# Altium PCB PCB.PcbDoc
Units mil, origin at the board's own origin, x right, y up, seen from the top; angles counter-clockwise.
Board outline 2055 x 3100 mil, 2 copper layers (Top Layer, Bottom Layer); 74 components, 111 nets, 390 pads, 96 vias.
Unrouted connection lines stored in the file: 52.
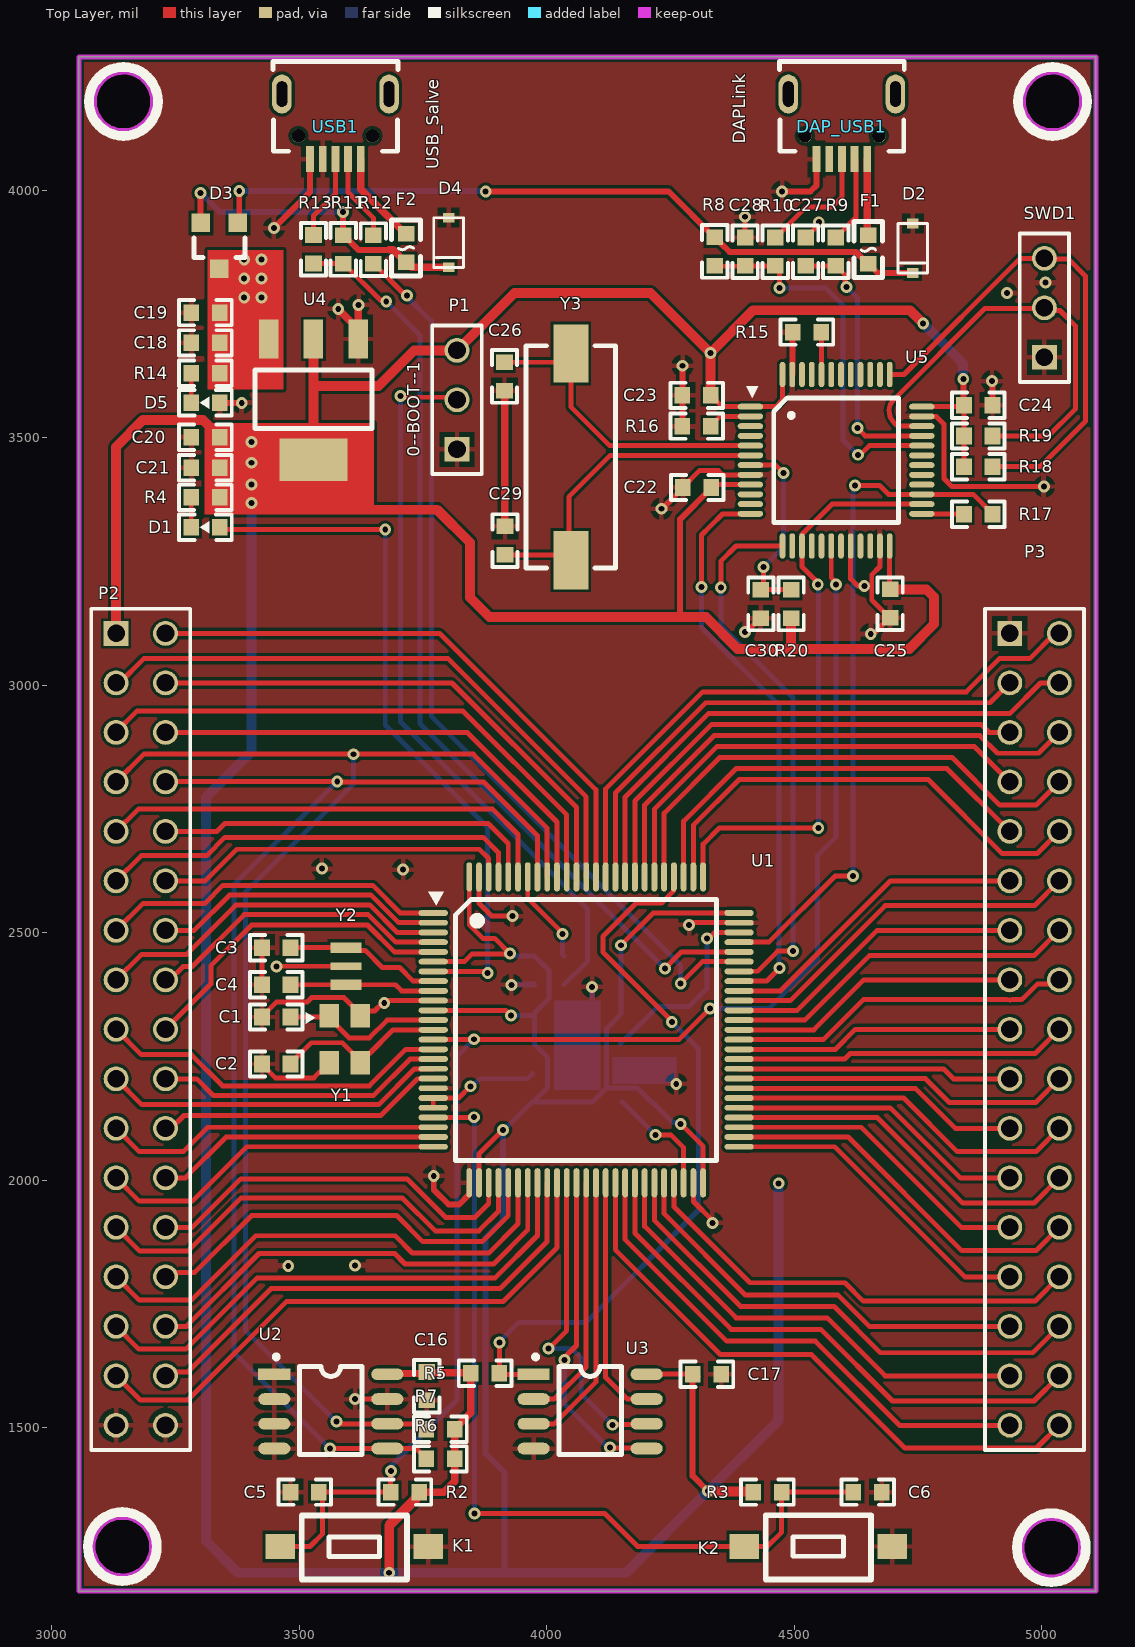
[diagram p0: Top Layer view]
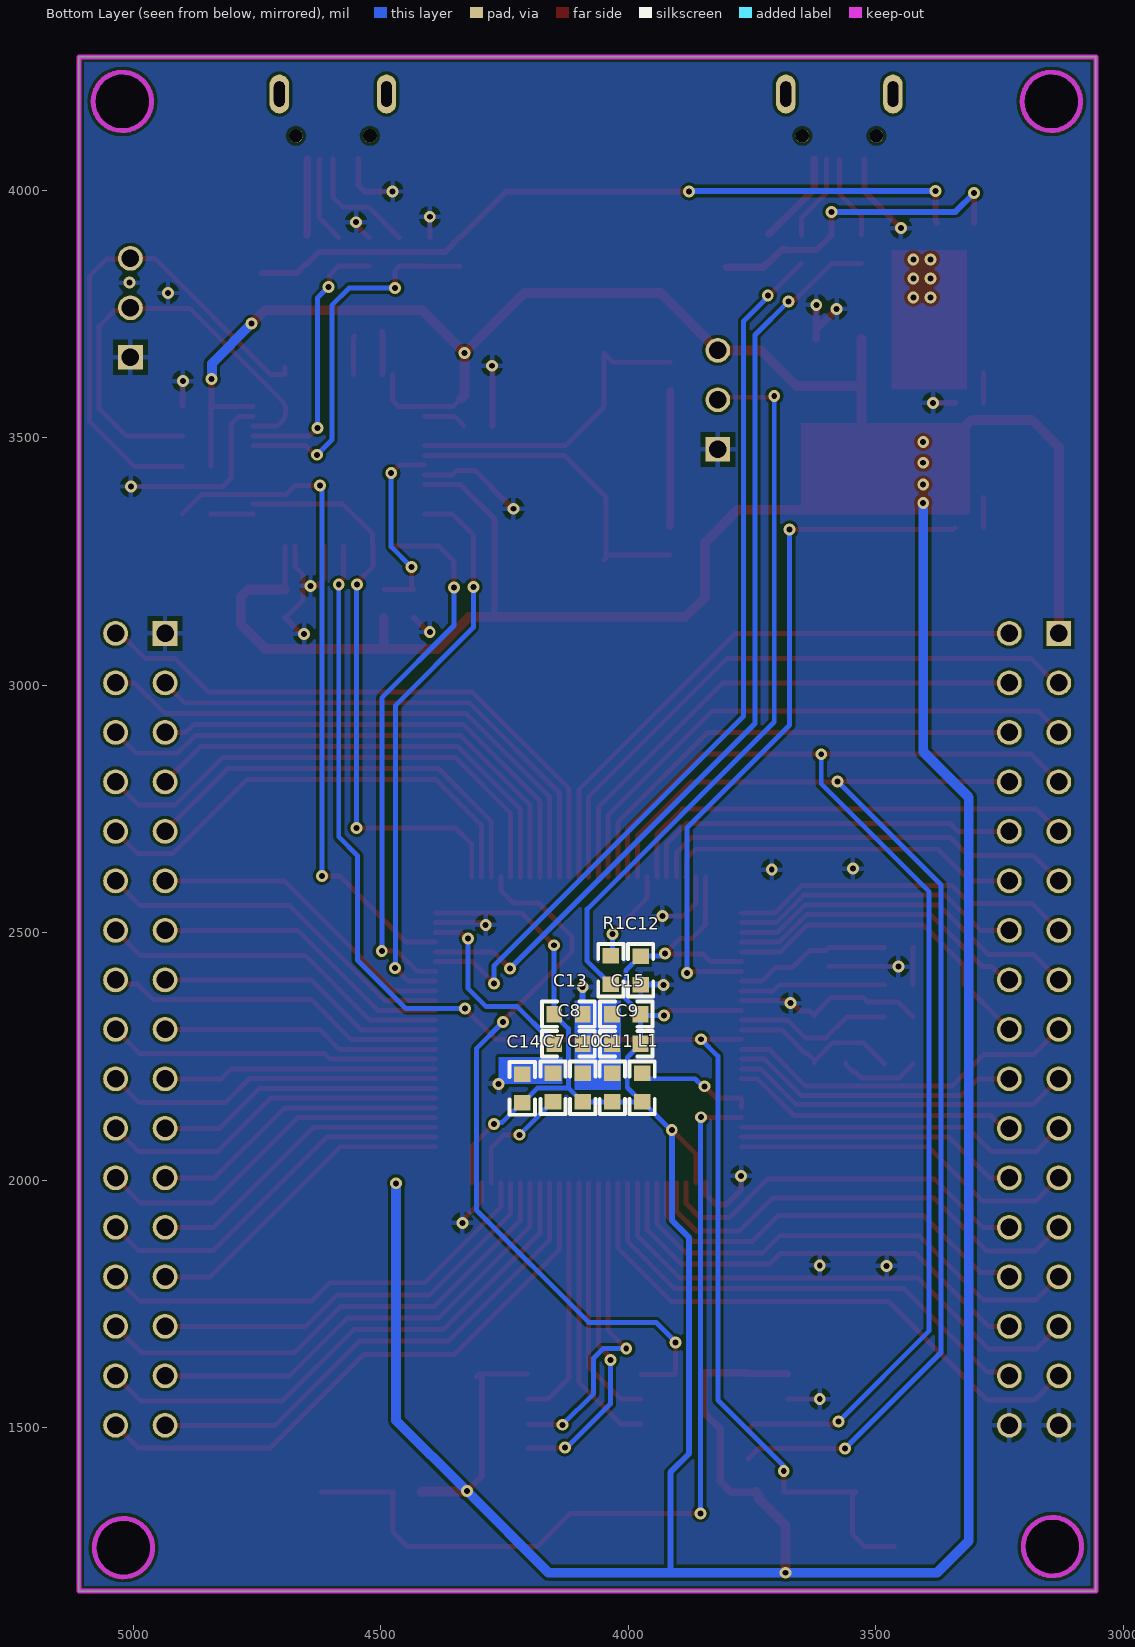
[diagram p1: Bottom Layer view, seen from below]
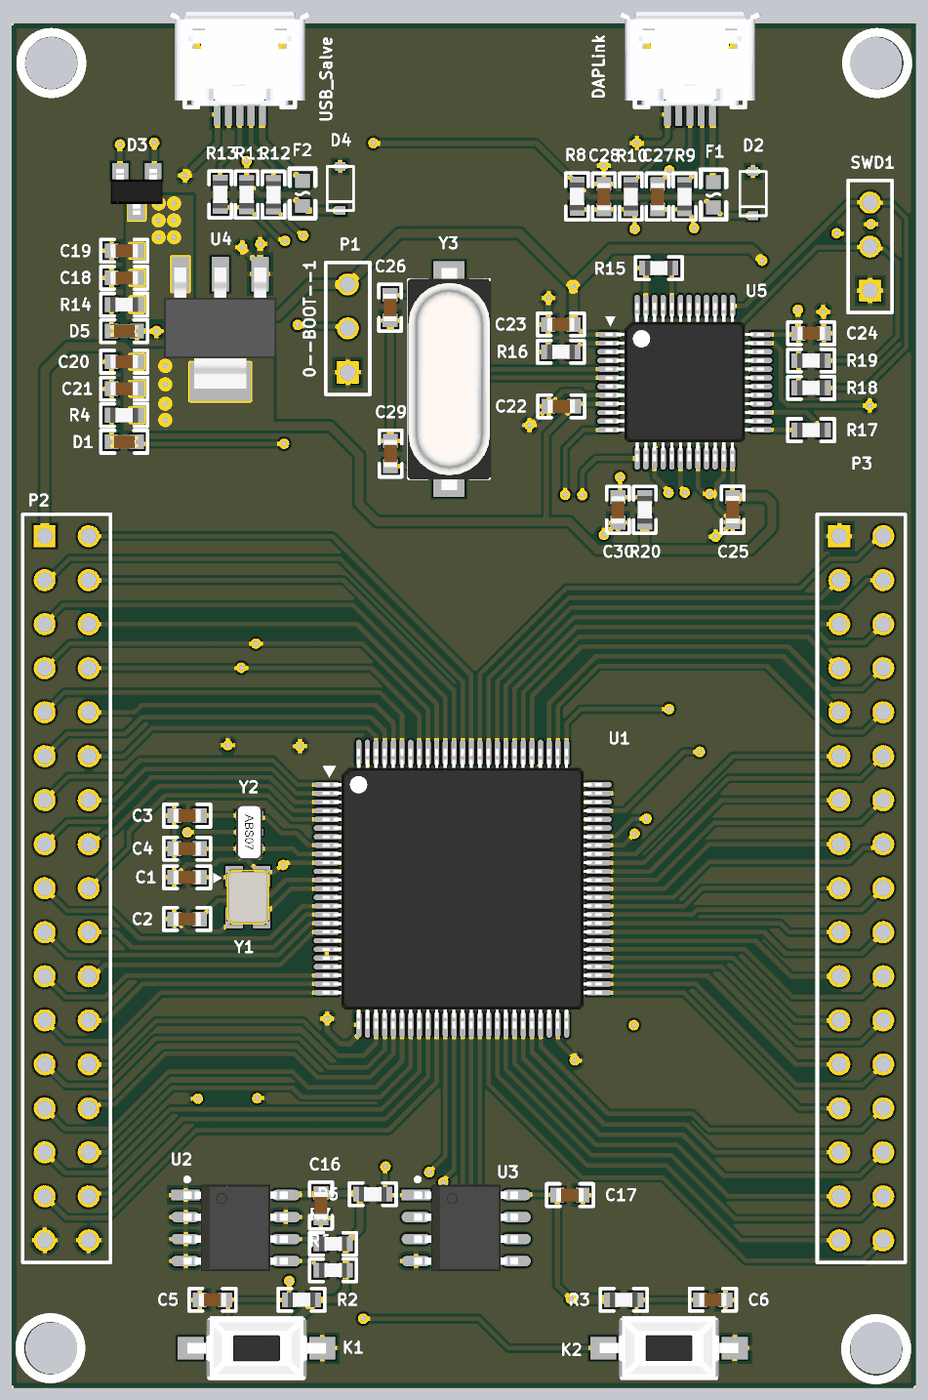
[diagram p2: 3D render of the assembled board from above, using the file's embedded part models]
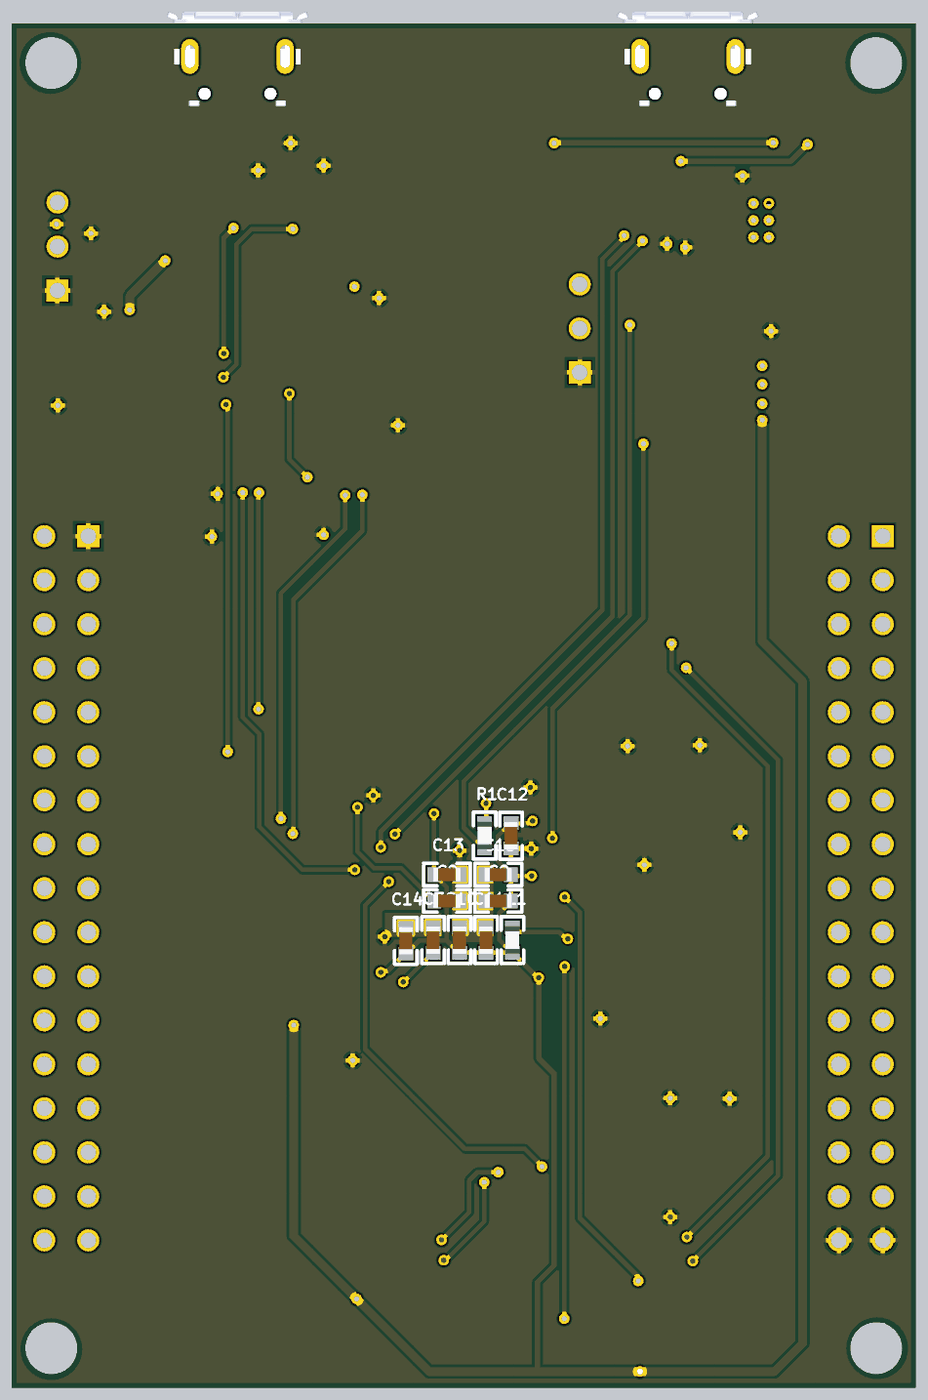
[diagram p3: 3D render of the assembled board from below, using the file's embedded part models]

## Layer stack, top to bottom
Top Solder: solder mask 0.4, Solder Resist, Dk 3.5
Top Layer: signal copper 1.4
Dielectric 1: dielectric 12.6, FR-4, Dk 4.8
Bottom Layer: signal copper 1.4
Bottom Solder: solder mask 0.4, Solder Resist, Dk 3.5

## Board outline
3055,1170 5110,1170 5110,4270 3055,4270
cut-out: 3204.06,1260 cw(c3145,1260) 3145,1200.94 cw(c3145,1260) 3085.94,1260 cw(c3145,1260) 3145,1319.06 cw(c3145,1260)
cut-out: 5020,1319.06 cw(c5020,1260) 5079.06,1260 cw(c5020,1260) 5020,1200.94 cw(c5020,1260) 4960.94,1260 cw(c5020,1260)
cut-out: 4960.94,4180 cw(c5020,4180) 5020,4239.06 cw(c5020,4180) 5079.06,4180 cw(c5020,4180) 5020,4120.94 cw(c5020,4180)
cut-out: 3145,4120.94 cw(c3145,4180) 3085.94,4180 cw(c3145,4180) 3145,4239.06 cw(c3145,4180) 3204.06,4180 cw(c3145,4180)

## Design rules (kind name [scope] priority, off if disabled: settings)
Clearance [All] p1: gap=6 ignorepadtopadclearanceinfootprint=TRUE
PolygonConnect [All] p1: connectstyle=Relief reliefconductorwidth=10 reliefentries=4 polygonreliefangle="90 Angle" airgapwidth=10
RoutingVias [All] p1: holewidth=12 width=24 viastyle="Through Hole" minholewidth=12 minwidth=24 maxholewidth=12 maxwidth=24
SolderMaskExpansion [All] p1: expansion=4 istentingtop=FALSE
UnRoutedNet [All] p1: checkbadconnections=TRUE
Width PWR_W [InNetClass('PWR')] p1: maxlimit=30 minlimit=12 preferedwidth=15
Width SIG_W [InNetClass('SIG_OUT')] p2: maxlimit=10 minlimit=6 preferedwidth=10
29 further rules are at their usual default settings.

## Classes and differential pairs
net class PWR: 3V3 5V GND NetD2_2 NetD3_2 NetDAP_USB1_1 NetF2_1
net class QSPI: PB2 PC11 PE7 PE8 PE9 PE10
net class SIG_OUT: PA1 PA2 PA3 PA4 PA5 PA6 PA7 PA8 PA15 PB0 PB1 PB3 PB4 PB5 PB6 PB7 PB8 PB9 PB10 PB11 PB12 PB13 PB14 PB15 PC0 PC1 PC2 PC3 PC4 PC5 PC6 PC7 PC8 PC9 PC10 PC12 PD0 PD1 PD2 PD3 PD4 PD5 PD6 PD7 PD8 PD9 PD10 PD11 PD12 PD13 PD14 PD15 PE0 PE1 PE2 PE3 PE4 PE5 PE6 PE11 PE12 PE13 PE14 PE15
component class SCH3: C22 C23 C24 C25 C26 C27 C28 C29 C30 R15 R16 R17 R18 R19 R20 SWD1 U5 Y3
component class SCH2: C18 C19 C20 C21 D D2 D3 D4 D5 D? DAP_USB1 F F1 F2 F? R8 R9 R10 R11 R12 R13 R14 U4 USB1
component class SCH1: C1 C2 C3 C4 C5 C6 C7 C8 C9 C10 C11 C12 C13 C14 C15 C16 C17 D1 K1 K2 L1 P1 P2 P3 R1 R2 R3 R4 R5 R6 R7 U1 U2 U3 Y1 Y2

## Components (designator, comment, footprint, x,y, rotation, side; value= is the part's Value field where it differs from the comment)
C1 "200" C_SOP_0603 3453.74,2330 r180 top
C2 "200" C_SOP_0603 3453.74,2235 r0 top
C3 "200" C_SOP_0603 3453.74,2470 r0 top
C4 "200" C_SOP_0603 3453.74,2395 r0 top
C5 "104" C_SOP_0603 3511.26,1370 r180 top
C6 "104" C_SOP_0603 4648.74,1370 r0 top
C7 "223" C_SOP_0603 4152,2187.26 r270 bottom
C8 "223" C_SOP_0603 4120.74,2276 r0 bottom
C9 "104" C_SOP_0603 4004,2276 r0 bottom
C10 "104" C_SOP_0603 4092,2187.26 r90 bottom
C11 "104" C_SOP_0603 4032,2187.26 r90 bottom
C12 "104" C_SOP_0603 3975,2424.26 r270 bottom
C13 "104" C_SOP_0603 4120.74,2336 r180 bottom
C14 "104" C_SOP_0603 4214,2185.74 r90 bottom
C15 "104" C_SOP_0603 4004,2336 r0 bottom
C16 "104" C_SOP_0603 3758,1584 r270 top
C17 "104" C_SOP_0603 4324,1608 r0 top
C18 "104" C_SOP_0603 3310.74,3692 r0 top
C19 "106" C_SOP_0603 3310.74,3753.47 r0 top
C20 "106" C_SOP_0603 3310.74,3501.47 r0 top
C21 "104" C_SOP_0603 3310.74,3440 r0 top
C22 "104" C_SOP_0603 4304.26,3400 r0 top
C23 "104" C_SOP_0603 4303.26,3586 r0 top
C24 "104" C_SOP_0603 4872.26,3566 r180 top
C25 "104" C_SOP_0603 4694,3165.26 r90 top
C26 "200" C_SOP_0603 3915,3624.26 r90 top
C27 "180" C_SOP_0603 4523.26,3876.39 r270 top
C28 "180" C_SOP_0603 4401,3876.39 r270 top
C29 "200" C_SOP_0603 3916,3292.74 r270 top
C30 "104" C_SOP_0603 4433,3164.74 r90 top
D1 "LED_RED" LED_0603_R 3310.74,3319.53 r0 top
D2 "Diode" SOD-123 4740,3883.34 r270 top
D3 "BAT54C" SOT23_3 3339,3888.26 r90 top
D4 "Diode" SOD-123 3802,3895 r270 top
D5 "LED_RED" LED_0603_R 3310.74,3571 r0 top
DAP_USB1 "USB_Micor" USB_Micor 4592.73,4142.34 r90 top locked
F1 "6V/500mA" FUSE_0603 4650,3908.3 r270 top
F2 "6V/500mA" FUSE_0603 3716,3911.38 r270 top
K1 "KEY" SW_PB_3X6 3611.51,1260 r180 top locked
K2 "KEY" SW_PB_3X6 4549.01,1260.13 r180 top locked
L1 "600R/100MHz" R_SMD_0603 3972,2187.26 r90 bottom
P1 "Header 3" HDR1X3 3819,3477 r90 top
P2 "Header 17X2" HDR2X17 3130,3105 r270 top
P3 "Header 17X2" HDR2X17 4936,3105 r270 top
R1 "10K" R_SMD_0603 4035,2424.74 r270 bottom
R2 "10k" R_SMD_0603 3713.74,1370 r0 top
R3 "10k" R_SMD_0603 4446.26,1370 r180 top
R4 "4.7K" R_SMD_0603 3310.74,3380 r0 top
R5 "10k" R_SMD_0603 3875.74,1610 r180 top
R6 "4.7K" R_SMD_0603 3785.56,1437 r180 top
R7 "4.7K" R_SMD_0603 3785.56,1497 r180 top
R8 "10k" R_SMD_0603 4340,3877 r90 top
R9 "33R" R_SMD_0603 4584.4,3876.39 r270 top
R10 "33R" R_SMD_0603 4462.13,3876.39 r270 top
R11 "10k" R_SMD_0603 3589,3881 r90 top
R12 "33R" R_SMD_0603 3650,3880.74 r270 top
R13 "33R" R_SMD_0603 3529,3881.39 r270 top
R14 "4.7K" R_SMD_0603 3310.74,3631 r0 top
R15 "10k" R_SMD_0603 4526,3714 r180 top
R16 "10K" R_SMD_0603 4303.26,3524 r0 top
R17 "100R" R_SMD_0603 4872.26,3346 r0 top
R18 "10K" R_SMD_0603 4872.26,3442 r180 top
R19 "10K" R_SMD_0603 4872.26,3504 r180 top
R20 "10K" R_SMD_0603 4494,3164.74 r270 top
SWD1 "Header 3" HDR1X3 5006,3663 r90 top
U1 "STM32H750VB" LQFP_100_14X14 4080,2304.06 r270 top locked
U2 "AT24C02" SOIC_8 3564,1533 r270 top
U3 "W25Q256JVEQ" SOIC_8 4088,1533 r270 top
U4 "LDO-3.3-AMS1117" SOT223_3 3529,3578 r90 top
U5 "STM32F103C8" LQFP_48_7X7 4585,3455 r270 top locked
USB1 "USB_Micor" USB_Micor 3569.38,4142.34 r90 top locked
Y1 "XTAL_4" XTAL_SMD_3225 3592,2285 r270 top
Y2 "XTAL-3" XTAL_SMD_3215_2 3595,2432.6 r270 top
Y3 "8MHz" XTAL_SMD_49S 4049,3462 r90 top

## Footprints (in the part's own frame and the unit in brackets; to place one, negate y for a bottom-side part, rotate by r counter-clockwise, add the part's x,y. Pads: shape width x height; smd on the part's side, far side on the other; paste and mask are expansions set on the pad)
C_SOP_0603 [mm]
  rect 0.8x0.85 smd: 1(-0.73,0) 2(0.73,0)
  silkscreen extent -1.35,-0.65 1.35,0.65, body extent -0.8,-0.4 0.8,0.4, height 0.6
FUSE_0603 [mm]
  rect 0.8x0.85 smd: 1(-0.028,0) 2(1.432,0)
  silkscreen extent -0.74,-0.74 2.13,0.74
HDR1X3 [mm] "Connector; Header; 3 Position"
  rect 1.27x1.27 hole 0.9: 1(0,0)
  round 1.27 hole 0.9: 2(2.54,0) 3(5.08,0)
  silkscreen extent -1.27,-1.27 6.35,1.27
HDR2X17 [mm] "Connector; Header; 17x2 Position"
  rect 1.27x1.27 hole 0.9: 1(0,0)
  round 1.27 hole 0.9: 2(0,2.54) 3(2.54,0) 4(2.54,2.54) 5(5.08,0) 6(5.08,2.54) 7(7.62,0) 8(7.62,2.54) 9(10.16,0) 10(10.16,2.54) 11(12.7,0) 12(12.7,2.54) 13(15.24,0) 14(15.24,2.54) 15(17.78,0) 16(17.78,2.54) 17(20.32,0) 18(20.32,2.54) 19(22.86,0) 20(22.86,2.54) 21(25.4,0) 22(25.4,2.54) 23(27.94,0) 24(27.94,2.54) 25(30.48,0) 26(30.48,2.54) 27(33.02,0) 28(33.02,2.54) 29(35.56,0) 30(35.56,2.54) 31(38.1,0) 32(38.1,2.54) 33(40.64,0) 34(40.64,2.54)
  silkscreen extent -1.27,-1.27 41.91,3.81
LED_0603_R [mm]
  rect 0.8x0.85 smd: 1(-0.73,0) 2(0.73,0)
  silkscreen extent -1.35,-0.65 1.35,0.65, body extent -0.81,-0.4 0.81,0.4, height 0.6
LQFP_48_7X7 [mm]
  oval 0.3x1.3 smd: 1(-2.75,-4.4) 2(-2.25,-4.4) 3(-1.75,-4.4) 4(-1.25,-4.4) 5(-0.75,-4.4) 6(-0.25,-4.4) 7(0.25,-4.4) 8(0.75,-4.4) 9(1.25,-4.4) 10(1.75,-4.4) 11(2.25,-4.4) 12(2.75,-4.4) 25(2.75,4.4) 26(2.25,4.4) 27(1.75,4.4) 28(1.25,4.4) 29(0.75,4.4) 30(0.25,4.4) 31(-0.25,4.4) 32(-0.75,4.4) 33(-1.25,4.4) 34(-1.75,4.4) 35(-2.25,4.4) 36(-2.75,4.4)
  oval 1.3x0.3 smd: 13(4.4,-2.75) 14(4.4,-2.25) 15(4.4,-1.75) 16(4.4,-1.25) 17(4.4,-0.75) 18(4.4,-0.25) 19(4.4,0.25) 20(4.4,0.75) 21(4.4,1.25) 22(4.4,1.75) 23(4.4,2.25) 24(4.4,2.75) 37(-4.4,2.75) 38(-4.4,2.25) 39(-4.4,1.75) 40(-4.4,1.25) 41(-4.4,0.75) 42(-4.4,0.25) 43(-4.4,-0.25) 44(-4.4,-0.75) 45(-4.4,-1.25) 46(-4.4,-1.75) 47(-4.4,-2.25) 48(-4.4,-2.75)
  silkscreen extent -3.8,-4.6 3.2,3.2, body extent -4.57,-4.57 4.57,4.57, height 1.62
LQFP_100_14X14 [mm]
  oval 0.3x1.5 smd: 1(-6,-7.85) 2(-5.5,-7.85) 3(-5,-7.85) 4(-4.5,-7.85) 5(-4,-7.85) 6(-3.5,-7.85) 7(-3,-7.85) 8(-2.5,-7.85) 9(-2,-7.85) 10(-1.5,-7.85) 11(-1,-7.85) 12(-0.5,-7.85) 13(0,-7.85) 14(0.5,-7.85) 15(1,-7.85) 16(1.5,-7.85) 17(2,-7.85) 18(2.5,-7.85) 19(3,-7.85) 20(3.5,-7.85) 21(4,-7.85) 22(4.5,-7.85) 23(5,-7.85) 24(5.5,-7.85) 25(6,-7.85) 51(6,7.85) 52(5.5,7.85) 53(5,7.85) 54(4.5,7.85) 55(4,7.85) 56(3.5,7.85) 57(3,7.85) 58(2.5,7.85) 59(2,7.85) 60(1.5,7.85) 61(1,7.85) 62(0.5,7.85) 63(0,7.85) 64(-0.5,7.85) 65(-1,7.85) 66(-1.5,7.85) 67(-2,7.85) 68(-2.5,7.85) 69(-3,7.85) 70(-3.5,7.85) 71(-4,7.85) 72(-4.5,7.85) 73(-5,7.85) 74(-5.5,7.85) 75(-6,7.85)
  oval 1.5x0.3 smd: 26(7.85,-6) 27(7.85,-5.5) 28(7.85,-5) 29(7.85,-4.5) 30(7.85,-4) 31(7.85,-3.5) 32(7.85,-3) 33(7.85,-2.5) 34(7.85,-2) 35(7.85,-1.5) 36(7.85,-1) 37(7.85,-0.5) 38(7.85,0) 39(7.85,0.5) 40(7.85,1) 41(7.85,1.5) 42(7.85,2) 43(7.85,2.5) 44(7.85,3) 45(7.85,3.5) 46(7.85,4) 47(7.85,4.5) 48(7.85,5) 49(7.85,5.5) 50(7.85,6) 76(-7.85,6) 77(-7.85,5.5) 78(-7.85,5) 79(-7.85,4.5) 80(-7.85,4) 81(-7.85,3.5) 82(-7.85,3) 83(-7.85,2.5) 84(-7.85,2) 85(-7.85,1.5) 86(-7.85,1) 87(-7.85,0.5) 88(-7.85,0) 89(-7.85,-0.5) 90(-7.85,-1) 91(-7.85,-1.5) 92(-7.85,-2) 93(-7.85,-2.5) 94(-7.85,-3) 95(-7.85,-3.5) 96(-7.85,-4) 97(-7.85,-4.5) 98(-7.85,-5) 99(-7.85,-5.5) 100(-7.85,-6)
  silkscreen extent -7.1,-8.1 6.7,6.7, body extent -8.07,-8.08 8.07,8.06, height 1.62
R_SMD_0603 [mm]
  rect 0.8x0.85 smd: 1(-0.73,0) 2(0.73,0)
  silkscreen extent -1.35,-0.65 1.35,0.65, body extent -0.8,-0.43 0.8,0.43, height 0.48
SOD-123 [mm]
  rect 0.5x0.6 smd: 1(-1.275,0) 2(1.275,0)
  silkscreen extent -1.27,-0.76 1.28,0.76
SOIC_8 [mm]
  rect 0.6x1.65 smd: 1(-1.905,-2.9)
  oval 0.6x1.65 smd: 2(-0.635,-2.9) 3(0.635,-2.9) 4(1.905,-2.9) 5(1.905,2.9) 6(0.635,2.9) 7(-0.635,2.9) 8(-1.905,2.9)
  silkscreen extent -2.9,-2.9 2.2,1.6, body extent -2.5,-3.01 2.5,3.01, height 1.75
SOT23_3 [mm]
  rect 0.95x0.95 smd: 1(1.175,-0.95) 2(1.175,0.95) 3(-1.175,0)
  silkscreen extent -0.6,-1.3 0.4,1.3, body extent -1.34,-1.5 1.3,1.5, height 1.08
SOT223_3 [mm]
  rect 2x1 smd: 1(3.1,-2.3) 2(3.1,0) 3(3.1,2.3)
  rect 2.2x3.5 smd: 4(-3.1,0)
  silkscreen extent -1.5,-3 1.5,3, body extent -3.5,-3.25 3.5,3.25, height 1.64
SW_PB_3X6 [mm]
  rect 1.5x1.3 smd: 1(-3.8,0) 2(3.8,0)
  silkscreen extent -2.7,-1.6 2.7,1.7, body extent -4,-1.85 4,1.85, height 2.6
USB_Micor [mm]
  rect 1.35x0.4 smd: 1(-2,-1.402) 2(-2,-0.752) 3(-2,-0.102) 4(-2,0.548) 5(-2,1.198)
  round 0.7 hole 0.7 unplated: G1(-0.813,-2.002) G2(-0.813,1.798)
  oval 2x1 hole 0.55 slot 1.3 at 0 deg: G3(1.337,-2.852) G6(1.337,2.648)
  silkscreen extent -1.6,-3.3 3,3.1, body extent -1.52,-4.2 3.91,4, height 2.68
XTAL_SMD_49S [mm]
  rect 3x1.8 smd: 1(-5.3,0) 2(5.3,0)
  silkscreen extent -5.7,-2.3 5.7,2.3, body extent -6.4,-2.43 6.4,2.4, height 4.4
XTAL_SMD_3215_2 [mm] "CSTCE16M0V53-R0"
  rect 0.55x1.6 smd: 1(-0.95,0) 3(0.95,0)
  rect 0.4x1.6 smd: 2(0,0)
  body extent -1.61,-0.76 1.61,0.76, height 0.91
XTAL_SMD_3225 [mm]
  rect 1.2x1 smd: 1(-1.2,-0.8) 2(1.2,-0.8) 3(1.2,0.8) 4(-1.2,0.8)
  silkscreen extent -1.4,-2 -0.8,-1.5, body extent -1.6,-1.25 1.6,1.25, height 0.6

## Part data
C1 C2 C3 C4 C5 C6 C7 C8 C9 C10 C11 C12 C13 C14 C15 C16 C17: library part Cap
C18 C19 C20 C21 C22 C23 C24 C25 C26 C27 C28 C29 C30: library part Cap, "电容_无极性"
D1 D5: library part LED, "发光二极管"
D2 D4: "肖特基二极管 / 1N4007、SS24"
D3: "肖特基二极管*2"
F1 F2: library part FUSE, "自恢复保险丝"
L1: library part L
P1 SWD1: "Header, 3-Pin", LatestRevisionDate=17-Jul-2002, LatestRevisionNote="Re-released for DXP Platform.", Publisher="Altium Limited"
P2 P3: "Header, 17-Pin, Dual row", LatestRevisionDate=17-Jul-2002, LatestRevisionNote="Re-released for DXP Platform.", Publisher="Altium Limited"
R1 R2 R3 R4 R5 R6 R7 R14: library part Res
R8 R9 R10 R11 R12 R13 R15 R16 R17 R18 R19 R20: library part Res, "电阻"
U1 U5: "ST-MCU"
U2: "EEPROM"
U3: "QSPI-FLASH"
U4: "LDO"
Y3: library part XTAL_SMD

## Via types
v1: diameter 24, hole 12, Top Layer to Bottom Layer, 96 vias

## Nets (pads, with @x,y where several pads share a name; then routed paths per layer and width w, separated by ;. In a path a pad name is that pad's centre, name@x,y a point inside that pad or via, vN(x,y) a via of type N, cw(c..) or ccw(c..) an arc to the next point about the centre after c; other vN are vias at no path point)
3V3: C9.1 C10.1 C11.1 C12.1 C13.1 C14.1 C15.1 C16.1 C17.1 C20.2 C21.2 C22.2 C23.2 C24.2 C25.2 L1.1 P1.3 P2.1 R2.2 R3.2 R4.2 R5.2 R6.1 R7.1 R18.2 R19.2 R20.2 U1.6 U1.11 U1.27 U1.50 U1.75 U1.100 U2.8 U3.8 U4.2 U4.4 U5.1 U5.9 U5.24 U5.36 U5.48 | length 13312.6
  Top Layer w10: U1.11 3917.57,2343.43 v1(3928,2333) ; U1.6 3833.85,2441.85 3849,2457 3925,2457 v1(3926,2458) 3895,2489 3871,2489 3843.78,2516.22 U1.100 ; U1.27 3863.46,2053.46 v1(3912,2102) ; v1(4150,2475) 4215.28,2540.28 U1.75 ; U3.8@4203.17,1609 4301.52,1609 C17.1@4306.52,1604 ; v1(4271,2114) 4316.22,2068.78 U1.50 ; C22.2 4338.79,3405.79 U5.9 ; C23.2@4337.37,3579.64 4342.75,3574.27 4343.73,3574.27 4354.73,3563.27 U5.1 4463.27,3563.27 4476.73,3576.73 U5.48 ; U5.24 4693.27,3194.73 C25.2 ; U5.36 4840.79,3563.27 C24.2 R19.2 R18.2
  Top Layer w12: 3529,3398 U4.4 ; 4270,3138 4270,3336.02 4333,3399.02 C22.2 ; C17.1 4295.26,1402.74 v1(4326,1372) ; v1(4842,3619) 4842,3567.52 C24.2
  Top Layer w15: U2.8 3679.82,1609.65 3757.65,1609.65 3759.37,1611.37 3845.63,1611.37 R5.2 3847,1530.68 3814.3,1497.98 R7.1 R6.1 3814.3,1392.3 3792,1370 R2.2
  Top Layer w20: P2.1 3130,3482 3184,3536 3305.94,3536 3339.48,3502.46 C20.2 ; U4.4 3529,3605 ; U4.2 3529,3605 ; 3623,3408 3623,3373 3641,3355 3779,3355 3845,3289 3845,3178 3885,3138 4270,3138 4322,3138 4386,3074 4497,3074 ; v1(3682,1207) 3682,1303 3736.73,1357.73 3736.73,1364.25 R2.2 ; v1(4326,1372) 4326.77,1371.23 4416.28,1371.23 R3.2 ; C23.2@4337.37,3579.64 4331.05,3585.97 v1(4331.05,3671.95) ; v1@4468.5,1994.5 v1(4469,1994) ; R20.2 4494,3077 4497,3074 ; C25.2 4768,3194 4783,3179 4783,3124 4733,3074 4497,3074 ; v1(4761,3731) 4734,3758 4417.09,3758 v1(4331.05,3671.95) ; 3529,3605 3660,3605 3732,3677 P1.3 3935,3793 4210,3793 v1(4331.05,3671.95)
  Bottom Layer w10: v1(3912,2102) 3914.5,2102 3971.02,2158.52 L1.1 L1.1@3972.98,2158.52 ; v1(3926,2458) 3929.79,2458 3934.79,2453 C12.1 3975.98,2453 4005,2423.98 4005,2366.72 3975.26,2336.98 C15.1 ; v1(3928,2333) 3972.26,2333 C15.1 ; v1(4150,2475) 4150,2335.54 4121,2306.54 4121,2187.46 4121.46,2187 ; v1(4271,2114) 4268.32,2116.68 4255.31,2116.68 4214.98,2157 C14.1 4213.02,2157 4183.02,2187 4121.46,2187 ; L1.1@3972.98,2158.52 C11.1 C10.1 4092.98,2158.52 4121.46,2187 ; L1.1@3972.98,2158.52 4002,2187.54 4002,2248.28 3975.26,2275.02 C9.1 C15.1
  Bottom Layer w12: v1(3912,2102) 3912,1919 3877,1884 3877,1448 3915,1410 3915,1213.5 3921.5,1207
  Bottom Layer w20: v1(3404,3369) 3404,2866 3312,2774 3312,1271 3376,1207 v1(3682,1207) 3921.5,1207 4161,1207 v1(4326,1372) 4469,1515 v1(4469,1994) ; v1(4761,3731) 4841.23,3650.77 4841.23,3619.77 v1(4842,3619)
  other v1: 3404,3406 3404,3450 3404,3492
5V: C18.2 C19.2 D3.3 R14.2 U4.3
  other v1: 3389,3784 3424,3784 3389,3822.5 3424,3822.5 3389,3861 3424,3861
A_SWCLK: U1.76 U5.15 U5.26 | length 1187.1
  Top Layer w10: U1.76 4316.22,2679.22 4349,2712 v1(4549,2712) ; v1(4548,3204) 4548,3208 4516.1,3239.9 U5.15 4516.45,3282.12 4516.45,3306.03 4576.84,3366.42 U5.26
  Bottom Layer w10: v1(4548,3204) 4549,3203 v1(4549,2712)
A_SWDIO: R17.2 U1.72 U5.27 | length 1378.6
  Top Layer w10: U1.72 4449.22,2481.22 4583,2615 v1(4619,2615) ; v1(4623,3404) 4673,3404 4690.9,3386.1 U5.27 4861.88,3386.1 4901,3346.98 R17.2
  Bottom Layer w10: v1(4619,2615) 4619,3400 v1(4623,3404)
BOOT0: P1.2 R1.2 | length 1483.3
  Top Layer w10: v1(3705,3585) 3707.68,3582.32 3813.68,3582.32 P1.2
  Bottom Layer w10: v1(3705,3585) 3705,2926 4083,2548 4083,2443.02 4035.98,2396 R1.2
DAP_RX: U1.68 U5.12 | length 1149.8
  Top Layer w10: v1(4313,3199) 4313,3304 4332,3323 4355.39,3346.39 4411.43,3346.39 U5.12 ; U1.68 4444.48,2402.48 v1(4471,2429)
  Bottom Layer w10: v1(4313,3199) 4313,3117 4470,2960 4470,2430 v1(4471,2429)
DAP_TX: U1.69 U5.13 | length 1111.8
  Top Layer w10: v1(4352,3198) 4352,3251 4382.77,3281.77 U5.13 ; U1.69 4389.4,2422.51 4426.51,2422.51 4467,2463 v1(4498,2463)
  Bottom Layer w10: v1(4352,3198) 4352,3121 4498,2975 v1(4498,2463)
DAP_USB_DM: C27.2 R9.2 U5.33 | length 544.2
  Top Layer w10: C27.2 R9.2 4585.38,3847.65 4596.13,3836.9 4596.13,3835.91 4603.32,3828.72 4603.32,3807.68 v1(4606,3805) ; v1(4628,3520) 4643.79,3504.21 U5.33
  Bottom Layer w10: v1(4606,3805) 4628,3783 v1(4628,3520)
DAP_USB_DP: C28.2 R8.1 R10.2 U5.32 | length 764.5
  Top Layer w10: R8.1@4340,3847 4409.35,3847 4410,3847.65 R10.2 4471,3838.78 v1(4471,3803) ; v1(4629,3466) 4633.47,3466 4652,3484.53 U5.32
  Bottom Layer w10: v1(4471,3803) 4564,3803 4599,3768 4599,3496 v1(4629,3466)
DNRST: C30.2 R20.1 U5.7 | length 389.5
  Top Layer w10: U5.7 4462.84,3445.16 v1(4479,3429) ; v1(4438,3239) 4438,3198.48 C30.2 R20.1
  Bottom Layer w10: v1(4438,3239) 4479,3280 v1(4479,3429)
GND: C1.2 C2.1 C3.1 C4.1 C5.2 C6.2 C7.1 C8.1 C9.2 C10.2 C11.2 C12.2 C13.2 C14.2 C15.2 C16.2 C17.2 C18.1 C19.1 C20.1 C21.1 C22.1 C23.1 C24.1 C25.1 C26.1 C27.1 C28.1 C29.1 C30.1 D2.1 D4.1 D5.2 DAP_USB1.5 K1.1 K2.1 P1.1 P2.33 P2.34 P3.1 R15.2 R16.1 SWD1.1 U1.10 U1.19 U1.26 U1.49 U1.74 U1.99 U2.1 U2.2 U2.3 U2.4 U2.7 U3.4 U4.1 U5.8 U5.20 U5.23 U5.35 U5.47 USB1.4 USB1.5 Y1.2 Y1.4 Y2.2 | length 3528.7
  Top Layer w10: C2.1 3425,2234.02 3452.02,2207 3529.75,2207 3541.88,2219.13 3545.82,2219.13 3560.5,2233.82 Y1.2 ; C1.2 3425,2330.98 3454.02,2360 3516,2360 3525,2369 3590.68,2369 3623.5,2336.18 Y1.4 3633.36,2342.11 3652.32,2342.11 3668.21,2358 v1(3672,2358) 3677.11,2363.11 U1.10 ; C4.1 C3.1 ; v1@3451.32,2429.32 v1(3454,2432) 3454.6,2432.6 Y2.2 ; v1(3613,1558) U2.7 ; U1.99 3863.46,2559.54 3889,2534 v1(3931,2534) ; C22.1 4275.52,3400.98 4308.54,3434 4347.04,3434 4355.56,3425.47 U5.8 ; v1(4288,2516) 4292.59,2520.59 U1.74 ; U1.49 4296.88,1994.65 4296.88,1957.12 4335,1919 v1(4335,1914) ; C28.1 v1(4401,3947) ; C27.1 4524.25,3905.13 4550,3930.88 v1(4550,3936) ; U5.20 4614.53,3215.47 4629,3201 v1(4642,3201) ; U5.23 4673.58,3240.42 4657,3223.83 4657,3172.54 C25.1@4693.02,3136.52 ; U5.35 4758.57,3543.24 4787.76,3543.24 4803,3528 4803,3418 4818.9,3402.1 5004.9,3402.1 v1(5005,3402)
  Top Layer w12: D5.2 v1(3384,3571) ; v1(3449,3924) 3522.19,3997.19 USB1.5 ; v1(3772,2009) 3772,1981 3802,1951 3823.21,1951 3843.78,1971.57 U1.26 ; v1(4232,3357) 4233.5,3357 4275.52,3399.02 C22.1 ; R16.1 C23.1 4274.52,3645.52 v1(4275,3646) ; v1(4401,3108) 4404.02,3108 4432.02,3136 C30.1 ; v1(4476,3998) 4533,3998 4545.55,4010.55 DAP_USB1.5 ; U5.47 4496.51,3628.32 4496.51,3713.25 R15.2 ; v1(4655,3104) 4660.5,3104 4693.02,3136.52 C25.1 ; v1(4900,3615) 4901,3614 C24.1
  Top Layer w15: v1(3579,3761) 3579,3760.28 3619.55,3719.73 U4.1 3619.78,3700.27 3619.78,3768.78 v1(3620,3769) ; C26.1 3915.5,3595.02 3915.5,3321.98 C29.1
  Bottom Layer w12: v1(3929,2395) 3929.52,2395.52 C12.2 ; C13.2 v1(4092,2391) ; C14.2 4242.52,2214.48 v1(4262,2195)
  other v1: 3478,1827 3613,1828 3710,2628 3546,2630 4930,3793 5008,3814
NetC26_2: C26.2 U5.5 Y3.2 | length 644.3
  Top Layer w10: C26.2 4031.34,3653 Y3.2 4049,3563 4127.47,3484.53 U5.5
NetC29_2: C29.2 U5.6 Y3.1 | length 662.6
  Top Layer w10: C29.2 4038.34,3264 Y3.1@4045,3257.34 ; Y3.1 Y3.1@4045,3257.34 ; U5.6 4128.84,3464.84 4045,3381 Y3.1@4045,3257.34
NetD1_1: D1.1 R4.1 | length 60.5
  Top Layer w10: D1.1 R4.1
NetD2_2: D2.2 D3.1 F1.2 R8.2 | length 1496
  Top Layer w12: D3.1 3379,3937.12 v1(3379,3999) ; v1(3877,3998) 4246.76,3998 4339.02,3905.74 R8.2 4340.98,3905.74 4351.73,3894.99 4351.73,3893.73 4369.46,3876 4624.94,3876 4649.02,3851.92 F1.2 4650.98,3851.92 4669.76,3833.14 D2.2
  Bottom Layer w12: v1(3379,3999) 3876,3999 v1(3877,3998)
NetD3_2: D3.2 D4.2 F2.2 R11.2 | length 651.6
  Top Layer w12: v1(3301,3995) 3301,3935.12 D3.2 ; v1(3589,3957) R11.2 3589.98,3909.74 3619.72,3880 3682,3880
  Top Layer w15: 3682,3880 3690.02,3880 3715.02,3855 F2.2 3716.98,3855 3727.18,3844.8 D4.2
  Bottom Layer w12: v1(3301,3995) 3339,3957 v1(3589,3957)
NetD5_1: D5.1 R14.1 | length 60
  Top Layer w10: D5.1 R14.1
NetDAP_USB1_1: DAP_USB1.1 F1.1 | length 155.1
  Top Layer w15: DAP_USB1.1 4648.29,4063.23 4648.29,3911.11 F1.1
NetDAP_USB1_2: DAP_USB1.2 R9.1 | length 177
  Top Layer w10: R9.1 4585.38,3905.13 4596.13,3915.87 4596.13,3916.86 4625,3945.73 4625,4060.93 DAP_USB1.2
NetDAP_USB1_3: DAP_USB1.3 R10.1 | length 245.3
  Top Layer w10: R10.1 4463.12,3905.13 4524.99,3967 4577,3967 4596.73,3986.73 DAP_USB1.3
NetF2_1: F2.1 USB1.1 | length 189.6
  Top Layer w15: USB1.1 3624.56,4002.94 3654,3973.5 3715.02,3912.48 F2.1
NetL1_2: L1.2 U1.20 U1.21 | length 240.9
  Top Layer w10: U1.21 3770.94,2165.42 3771.78,2166.26 3822.26,2166.26 v1(3846,2190)
  Bottom Layer w10: v1(3846,2190) 3849.79,2190 3865.04,2205.25 3961.25,2205.25 L1.2
NetR1_1: R1.1 U1.94 | length 189.9
  Top Layer w10: U1.94 3961.89,2570.11 4032,2500 v1(4032,2498)
  Bottom Layer w10: v1(4032,2498) 4032,2456.48 R1.1
NetR12_1: R12.1 USB1.2 | length 175.3
  Top Layer w10: USB1.2 3599,3996 3650,3945 R12.1
NetR13_1: R13.1 USB1.3 | length 171.9
  Top Layer w10: R13.1 3529,3949 3573.38,3993.38 USB1.3
NetR15_1: R15.1 U5.44 | length 78.8
  Top Layer w10: R15.1@4553,3706 4555.47,3703.53 U5.44
NetR16_2: R16.2 U5.2 | length 87.5
  Top Layer w10: R16.2@4332,3524.98 4342.75,3535.73 4350.25,3543.24 4411.43,3543.24 U5.2
NetR17_1: R17.1 U5.25 | length 85.6
  Top Layer w10: U5.25 4842.79,3346.73 R17.1
NRST: C5.1 K1.2 R2.1 U1.14 U5.18 | length 3012.1
  Top Layer w10: K1.2 3522,1260 3547,1285 3547,1363 C5.1 R2.1 3685,1412 v1(3685.75,1412.75) ; U1.14 3852.37,2284.37 v1(3853,2285) 4268,2285 v1(4330,2347) ; U5.18 4575.16,3217.63 4585,3207.79 v1(4585,3204)
  Bottom Layer w10: v1(3685.75,1412.75) 3685.75,1422.75 3819,1556 3819,2251 v1(3853,2285) ; v1(4330,2347) 4449,2347 4547,2445 4547,2656 4585,2694 v1(4585,3204)
OSC32_IN: C3.2 U1.8 Y2.1 | length 316.4
  Top Layer w10: C3.2 Y2.1 3600.27,2464.73 3633.27,2464.73 3668,2430 3703,2430 3730.52,2402.48 U1.8
OSC32_OUT: C4.2 U1.9 Y2.3 | length 293.7
  Top Layer w10: C4.2 3482.68,2395.2 Y2.3 3694.8,2395.2 3707.2,2382.8 U1.9
OSC_IN: C1.1 U1.12 Y1.1 | length 320.7
  Top Layer w10: C1.1 3558.81,2330 3600.81,2288 3642,2288 3677.74,2323.74 U1.12
OSC_OUT: C2.2 U1.13 Y1.3 | length 351.7
  Top Layer w10: C2.2 3482.48,2235.98 3524.5,2278 3587.19,2278 Y1.3@3623.5,2241.69 ; Y1.3 Y1.3@3623.5,2241.69 ; U1.13 3689.8,2304.06 3642.12,2256.38 3638.18,2256.38 Y1.3@3623.5,2241.69
PA0: C6.1 K2.2 R3.1 U1.22 | length 1769
  Top Layer w10: U1.22 v1@3852.37,2126.89 ; v1(3854,1327) 4117,1327 4183.87,1260.13 K2.2 4446.13,1260.13 4475,1289 R3.1 C6.1
  Bottom Layer w10: v1(3853,2127.52) 3854,2126.52 v1(3854,1327)
PA1: P2.21 U1.23 | length 680.8
  Top Layer w10: P2.21 3177,2058 3266,2058 3315.2,2107.2 U1.23
PA2: P2.24 U1.24 | length 575.1
  Top Layer w10: P2.24 3270,2005 3352.52,2087.52 U1.24
PA3: P2.23 U1.25 | length 705.9
  Top Layer w10: P2.23 3177,1958 3284,1958 3393.83,2067.83 U1.25
PA4: P2.26 U1.28 | length 779.6
  Top Layer w10: P2.26 3284,1905 3382,2003 3718,2003 3796,1925 3855,1925 3883.15,1953.15 U1.28
PA5: P2.25 U1.29 | length 938
  Top Layer w10: P2.25 3178,1857 3275,1857 3382,1964 3709,1964 3775,1898 3863,1898 3902.83,1937.83 U1.29
PA6: P2.28 U1.30 | length 854.1
  Top Layer w10: P2.28 3237.65,1812.65 3254.53,1812.65 3255.86,1813.99 3288.99,1813.99 3404,1929 3697,1929 3750,1876 3870,1876 3922.52,1928.52 U1.30
PA7: P2.27 U1.31 | length 1007.3
  Top Layer w10: P2.27 3177,1758 3282,1758 3412,1888 3694,1888 3729,1853 3883,1853 3942.2,1912.2 U1.31
PA8: P3.11 U1.67 | length 639
  Top Layer w10: U1.67 4472.8,2382.8 4695,2605 P3.11
PA11: R12.2 U1.70 | length 1849.8
  Top Layer w10: R12.2 3650.98,3852 3714.98,3788 v1(3718,3788) ; v1(4271,2398) 4314.85,2441.85 U1.70
  Bottom Layer w10: v1(3718,3788) 3718,3785 3767,3736 3767,2938 4271,2434 v1(4271,2398)
PA12: R11.1 R13.2 U1.71 | length 1924.9
  Top Layer w10: R13.2@3529.98,3852.65 R13.2 3529.39,3852.26 R11.1 3589.98,3852.26 3663.57,3778.68 3673.32,3778.68 v1(3676,3776) ; v1(4239,2428) 4272.54,2461.54 U1.71
  Bottom Layer w10: v1(3676,3776) 3744,3708 3744,2923 v1(4239,2428)
PA15: P3.10 U1.77 | length 963
  Top Layer w10: U1.77 4296.54,2717.54 4389,2810 4771,2810 4921,2660 4991,2660 P3.10
PB0: P2.32 U1.34 | length 1002.4
  Top Layer w10: P2.32 3237.53,1612.53 3274.53,1612.53 3443,1781 3906,1781 4001.26,1876.26 U1.34
PB1: P2.31 U1.35 | length 1169.9
  Top Layer w10: P2.31 3179,1556 3275,1556 3474,1755 3912,1755 4020.94,1863.94 U1.35
PB2: U1.36 U3.6 | length 655.5
  Top Layer w10: v1(4004,1660) 4004.63,1660 4040.63,1696 U1.36 ; v1(4133,1506) 4134,1507 4201.17,1507 U3.6
  Bottom Layer w10: v1(4004,1660) 4051,1660 4070,1641 4070,1569 v1(4133,1506)
PB3: P2.4 U1.89 | length 1075
  Top Layer w10: P2.4 3809,3005 4060.32,2753.68 U1.89
PB4: P2.5 U1.90 | length 1141.1
  Top Layer w10: P2.5 3130,2906 3172,2948 3831,2948 4040.63,2738.37 U1.90
PB5: P2.6 U1.91 | length 976.8
  Top Layer w10: P2.6 3840,2905 4020.94,2724.06 U1.91
PB6: P2.7 R7.2 U1.92 U2.6 | length 2757.7
  Top Layer w10: P2.7 3186,2861 v1(3610,2861) 3852,2861 4001.26,2711.74 U1.92 ; v1(3575.29,1512.5) 3579.79,1508 U2.6 3746.07,1508 3756.82,1497.25 R7.2
  Bottom Layer w10: v1(3575.29,1512.5) 3392,1695.79 3392,2583 3610,2801 v1(3610,2861)
PB7: P2.8 R6.2 U1.93 U2.5 | length 2599.7
  Top Layer w10: P2.8 3230.5,2805.5 3576.5,2805.5 v1(3577,2806) 3578,2805 3873,2805 3981.57,2696.43 U1.93 ; v1(3562,1458) U2.5 3736.8,1458 3756.82,1437.98 R6.2
  Bottom Layer w10: v1(3562,1458) 3368,1652 3368,2597 v1(3577,2806)
PB8: P2.9 U1.95 | length 937.7
  Top Layer w10: P2.9 3175,2750 3891,2750 3942.2,2698.8 U1.95
PB9: P2.10 U1.96 | length 783.3
  Top Layer w10: P2.10 3334,2705 3350,2721 3882,2721 3922.52,2680.48 U1.96
PB10: P3.29 U1.46 | length 855.2
  Top Layer w10: U1.46 4237.48,1932.52 4402,1768 4589,1768 4652,1705 P3.29
PB11: P3.28 U1.47 | length 926.3
  Top Layer w10: U1.47 4257.51,1994.65 4257.51,1946.49 4411,1793 4603,1793 4640,1756 4987,1756 P3.28
PB12: P3.27 U1.51 | length 655.8
  Top Layer w10: U1.51 4582.17,2067.83 4845,1805 P3.27
PB13: P3.26 U1.52 | length 761.5
  Top Layer w10: U1.52 4609.48,2087.52 4839,1858 4989,1858 P3.26
PB14: P3.25 U1.53 | length 630.7
  Top Layer w10: U1.53 4635.8,2107.2 4838,1905 P3.25
PB15: P3.24 U1.54 | length 739.7
  Top Layer w10: U1.54 4668.11,2126.89 4841,1954 4985,1954 P3.24
PC0: P2.17 U1.15 | length 718.7
  Top Layer w10: P2.17 3181,2254 3282.06,2254 3345.06,2191 3642,2191 3715.68,2264.68 U1.15
PC1: P2.20 U1.16 | length 585.7
  Top Layer w10: P2.20 3293,2205 3327,2171 3650,2171 3724,2245 U1.16
PC2: P2.19 U1.17 | length 692.4
  Top Layer w10: P2.19 3182,2153 3660.63,2153 3732.6,2224.97 3770.6,2224.97 U1.17
PC3: P2.22 U1.18 | length 582.6
  Top Layer w10: P2.22 3241.39,2105 3267.39,2131 3665,2131 3739.28,2205.28 3770.6,2205.28 U1.18
PC4: P2.30 U1.32 | length 925.1
  Top Layer w10: P2.30 3272,1705 3419,1852 3693,1852 3714,1831 3893,1831 3961.89,1899.89 U1.32
PC5: P2.29 U1.33 | length 1072.1
  Top Layer w10: P2.29 3176,1659 3271,1659 3415,1803 3896,1803 3981.57,1888.57 U1.33
PC6: P3.15 U1.63 | length 588.8
  Top Layer w10: U1.63 4540.06,2304.06 4641,2405 P3.15
PC7: P3.14 U1.64 | length 722
  Top Layer w10: U1.64 4521.74,2323.74 4652,2454 4985,2454 P3.14
PC8: P3.13 U1.65 | length 613.9
  Top Layer w10: U1.65 4506.43,2343.43 4668,2505 P3.13
PC9: P3.12 U1.66 | length 747.1
  Top Layer w10: U1.66 4492.11,2363.11 4684,2555 4986,2555 P3.12
PC10: P3.9 U1.78 | length 868.5
  Top Layer w10: U1.78 4276.85,2725.69 4383.31,2832.15 4808.85,2832.15 P3.9
PC11: R5.1 U1.79 U3.1 | length 1488.7
  Top Layer w10: v1(3904.48,1672.48) R5.1 3906.48,1608 U3.1 ; v1(4253,2320) 4253,2322 4114,2461 4114,2493 4181.46,2560.46 4232.36,2560.46 4256.82,2584.92 4256.82,2612.76 U1.79
  Bottom Layer w10: v1(3904.48,1672.48) 3904.48,1673.48 3944,1713 4080,1713 4307,1940 4307,2266 v1(4253,2320)
PC12: P3.8 U1.80 | length 1033.3
  Top Layer w10: U1.80 4237.48,2742 4349.77,2854.29 4819.71,2854.29 4916,2758 4989,2758 P3.8
PC13: D1.2 U1.7 | length 1429.5
  Top Layer w10: D1.2 3344.01,3315 v1(3674,3315) ; U1.7 3877.83,2422.17 v1(3881,2419)
  Bottom Layer w10: v1(3674,3315) 3674,2920 3881,2713 v1(3881,2419)
PD0: P3.7 U1.81 | length 937.1
  Top Layer w10: U1.81 4217.8,2750.15 4344.08,2876.44 4864.56,2876.44 P3.7
PD1: P3.6 U1.82 | length 1073.3
  Top Layer w10: U1.82 4198.11,2758.3 4338.39,2898.58 4875.42,2898.58 4911,2863 4994,2863 P3.6
PD2: P3.5 U1.83 | length 981.3
  Top Layer w10: U1.83 4178.43,2766.46 4332.69,2920.73 4878.22,2920.73 4893.95,2905 P3.5
PD3: P3.4 U1.84 | length 1134.2
  Top Layer w10: U1.84 4158.74,2774.61 4327,2942.87 4935.87,2942.87 4998,3005 P3.4
PD4: P3.3 U1.85 | length 1058.7
  Top Layer w10: U1.85 4139.06,2782.77 4321.31,2965.02 4896.02,2965.02 P3.3
PD5: P3.2 U1.86 | length 1224.5
  Top Layer w10: U1.86 4119.37,2790.92 4315.62,2987.17 4848.16,2987.16 4915,3054 4976,3054 5027,3105 P3.2
PD6: P2.2 U1.87 | length 1176.7
  Top Layer w10: P2.2 3784,3105 4099.69,2789.32 U1.87
PD7: P2.3 U1.88 | length 1247.8
  Top Layer w10: P2.3 3137,3005 3186,3054 3801,3054 4080,2775 U1.88
PD8: P3.23 U1.55 | length 605.6
  Top Layer w10: U1.55 4694.43,2146.57 4836,2005 P3.23
PD9: P3.22 U1.56 | length 711.3
  Top Layer w10: U1.56 4721.74,2166.26 4830,2058 4989,2058 P3.22
PD10: P3.21 U1.57 | length 580.5
  Top Layer w10: U1.57 4745.06,2185.94 4826,2105 P3.21
PD11: P3.20 U1.58 | length 687
  Top Layer w10: U1.58 4765.37,2205.63 4814,2157 4988,2157 P3.20
PD12: P3.19 U1.59 | length 555.4
  Top Layer w10: U1.59 4802,2225.31 4822.31,2205 P3.19
PD13: P3.18 U1.60 | length 671.8
  Top Layer w10: U1.60 4602,2245 4613,2256 4987,2256 P3.18
PD14: P3.17 U1.61 | length 563.6
  Top Layer w10: U1.61 4583.69,2264.68 4624,2305 P3.17
PD15: P3.16 U1.62 | length 696.5
  Top Layer w10: U1.62 4559.37,2284.37 4640,2365 4928.76,2365 cw(c4928.72,2355) 4930.16,2364.9 ccw(c4936,2405) 4941.84,2364.9 cw(c4943.28,2355) 4943.33,2365 4955.86,2365 ccw(c4955.86,2375) 4962.93,2367.93 4991.47,2396.47 5027.47,2396.47 P3.16
PE0: P2.11 U1.97 | length 871.1
  Top Layer w10: P2.11 3181,2656 3313,2656 3350,2693 3872,2693 3902.83,2662.17 U1.97
PE1: P2.12 U1.98 | length 724.3
  Top Layer w10: P2.12 3310,2605 3374,2669 3864,2669 3882.8,2650.2 3882.8,2613.46 U1.98
PE2: P2.13 U1.1 | length 701.7
  Top Layer w10: P2.13 3184,2559 3309,2559 3346,2596 3648.51,2596 3704.23,2540.28 U1.1
PE3: P2.14 U1.2 | length 593.6
  Top Layer w10: P2.14 3288,2505 3359.31,2576.31 3645.57,2576.31 3701.29,2520.59 U1.2
PE4: P2.15 U1.3 | length 727.8
  Top Layer w10: P2.15 3181,2456 3272,2456 3371,2555 3371,2556.63 3642.62,2556.63 3698.35,2500.91 U1.3
PE5: P2.16 U1.4 | length 618.7
  Top Layer w10: P2.16 3238.59,2405 3265.78,2432.19 3284.19,2432.19 3388.94,2536.94 3639.68,2536.94 3695.41,2481.22 U1.4
PE6: P2.18 U1.5 | length 672.6
  Top Layer w10: P2.18 3321.69,2396.69 3321.69,2433.69 3404,2516 3638,2516 3692.46,2461.54 U1.5
PE7: U1.37 U3.5 | length 660.4
  Top Layer w10: v1(4036,1637) 4036,1642 4060.32,1666.32 U1.37 ; v1(4128,1460) 4129,1459 4201.17,1459 U3.5
  Bottom Layer w10: v1(4036,1637) 4036,1548.2 4124.2,1460 v1(4128,1460)
PE8: U1.38 U3.2 | length 505.4
  Top Layer w10: U3.2 4015.5,1558 4080,1622.5 U1.38
PE9: U1.39 U3.3 | length 563.5
  Top Layer w10: U3.3 4015.5,1508 4099.69,1592.19 U1.39
PE10: U1.40 U3.7 | length 494.2
  Top Layer w10: U1.40 4119.37,1601.63 4163,1558 U3.7
PE11: P3.34 U1.41 | length 1217.1
  Top Layer w10: U1.41 4139.06,1859.94 4351,1648 4535,1648 4724,1459 4990,1459 P3.34
PE12: P3.33 U1.42 | length 1047.4
  Top Layer w10: U1.42 4158.74,1880.26 4364,1675 4543,1675 4713,1505 P3.33
PE13: P3.32 U1.43 | length 1120.8
  Top Layer w10: U1.43 4178.43,1893.57 4373,1699 4554,1699 4699,1554 4985,1554 P3.32
PE14: P3.31 U1.44 | length 951
  Top Layer w10: U1.44 4198.11,1906.89 4383,1722 4567,1722 4684,1605 P3.31
PE15: P3.30 U1.45 | length 1027
  Top Layer w10: U1.45 4217.8,1919.2 4392,1745 4581,1745 4674.4,1651.6 4982.6,1651.6 P3.30
SWCLK: R18.1 SWD1.3 U5.37 | length 1042
  Top Layer w10: U5.37@4694.1,3642.87 4693.27,3642.04 U5.37 4722.23,3628.23 4957,3863 5005,3863 5006,3862 5054,3862 5089,3827 5089,3534 4997,3442 R18.1
SWDIO: R19.1 SWD1.2 U5.34 | length 927
  Top Layer w10: U5.34 4714.9,3523.9 cw(c4714.9,3537.9) 4705,3528 4702.61,3530.39 cw(c4728.21,3556) 4692,3556 cw(c4720.97,3556) 4700.49,3576.49 4886,3762 5006,3762 5010.28,3757.72 5037.28,3757.72 5069,3726 5069,3559 5014,3504 R19.1
VCAP1: C7.2 U1.48 | length 234.3
  Top Layer w10: v1(4220,2092) 4251,2092 4276.85,2066.15 U1.48
  Bottom Layer w10: C7.2 4152.98,2158.52 4219.5,2092 v1(4220,2092)
VCAP2: C8.2 U1.73 | length 392.5
  Top Layer w10: v1(4324,2489) 4327.79,2489 4339.69,2500.91 U1.73
  Bottom Layer w10: C8.2 4149.48,2276.98 4160.23,2287.73 4161.21,2287.73 4224.48,2351 4287,2351 4324,2388 v1(4324,2489)
pads on no net: DAP_USB1.4 DAP_USB1.G1 DAP_USB1.G2 DAP_USB1.G3 DAP_USB1.G6 U5.3 U5.4 U5.10 U5.11 U5.14 U5.16 U5.17 U5.19 U5.21 U5.22 U5.28 U5.29 U5.30 U5.31 U5.38 U5.39 U5.40 U5.41 U5.42 U5.43 U5.45 U5.46 USB1.G1 USB1.G2 USB1.G3 USB1.G6

## Polygon pours and split planes (outlines as drawn)
GND on Top Layer "GND_L01_P000" (solid, remove dead copper, pour order 0): 3055,1170 3055,4270 5110,4270 5110,1170
GND on Bottom Layer "GND_L02_P001" (solid, remove dead copper, pour order 1): 3055,1170 3055,4270 5110,4270 5110,1170

## Keep-outs
Keep-Out Layer:
  circle w10: c5020,1257.76 r59.06
  circle w10: c3142.76,1260 r59.06
  circle w10: c5022.24,4180 r59.06
  circle w10: c3145,4180 r59.06
  lines w10: 3055,4267.76 3055,1170 5110,1170 5110,4210 5110,4270 3055,4270

## Other copper
Top Layer:
  rectangle net 3V3: 3309,3345 3651,3530
  rectangle net 5V: 3315,3598 3468,3880
Bottom Layer:
  rectangle net GND: 4133,2195 4262,2249
  rectangle net GND: 4015,2183 4109,2363

## Silkscreen, mask and mechanical layers (free items; w line width, h text height)
Top Overlay:
  circle w19.68: c3142.76,1260 r69.64
  circle w19.68: c5020,1257.76 r69.64
  circle w19.68: c5022.24,4180 r69.64
  circle w19.68: c3145,4180 r69.64
  text "DAPLink" at 4401,4095 h25 r90
  text "USB_Salve" at 3781.83,4043 h25 r90
  text "0--BOOT--1" at 3744,3462 h25 r90

## Dimensions
3055,1170 to 5110,1170 on Top Overlay
3055,4270 to 3055,1170 on Top Overlay